# Altium PCB HVBoard_PCB.PcbDoc
Units mm, origin at the board's own origin, x right, y up, seen from the top; angles counter-clockwise.
Board outline 60 x 140 mm, 2 copper layers (Top Layer, Bottom Layer); 64 components, 28 nets, 196 pads, 10 vias.
Unrouted connection lines stored in the file: 15.
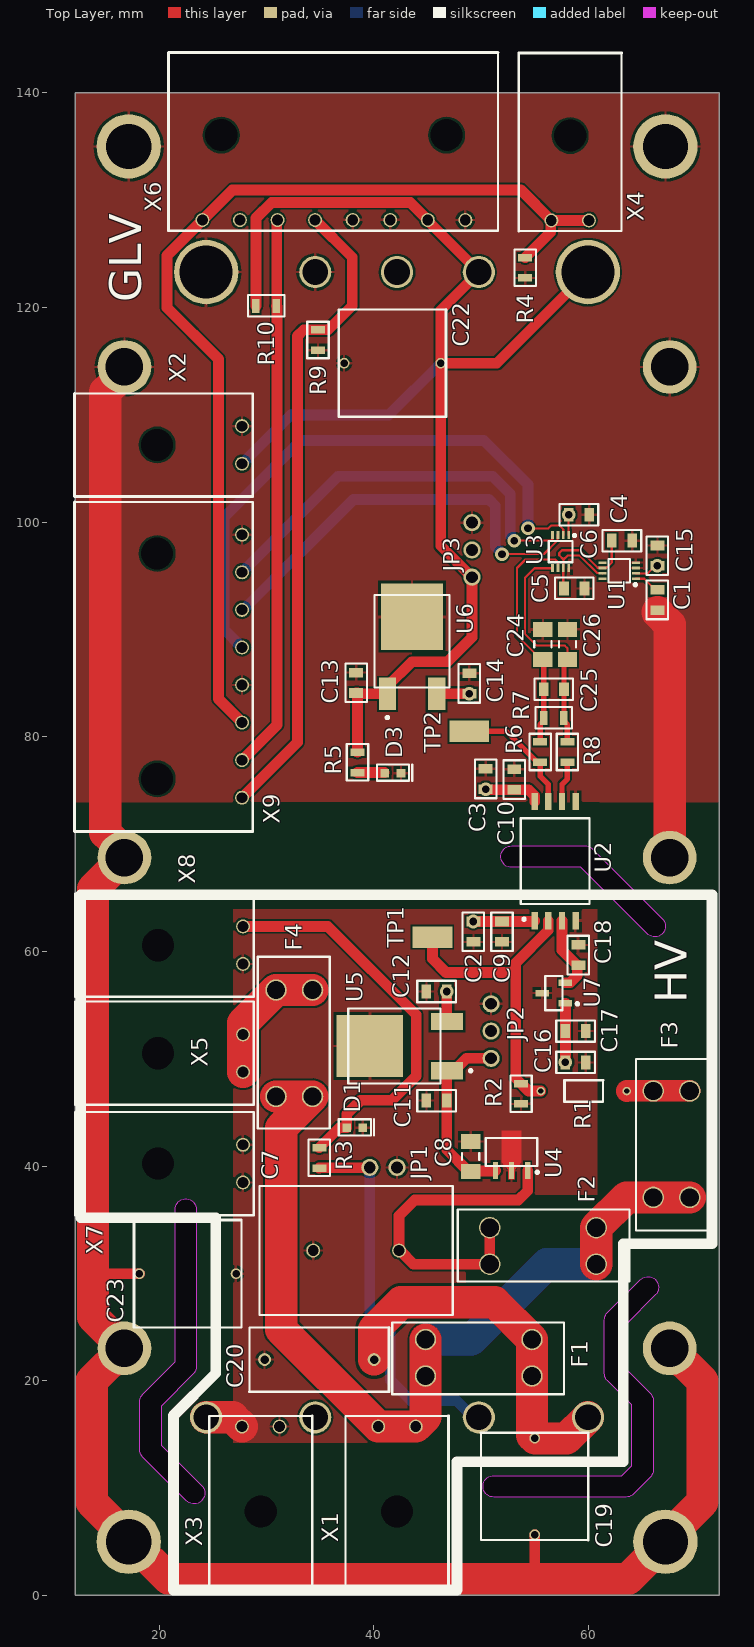
[diagram p0: Top Layer view]
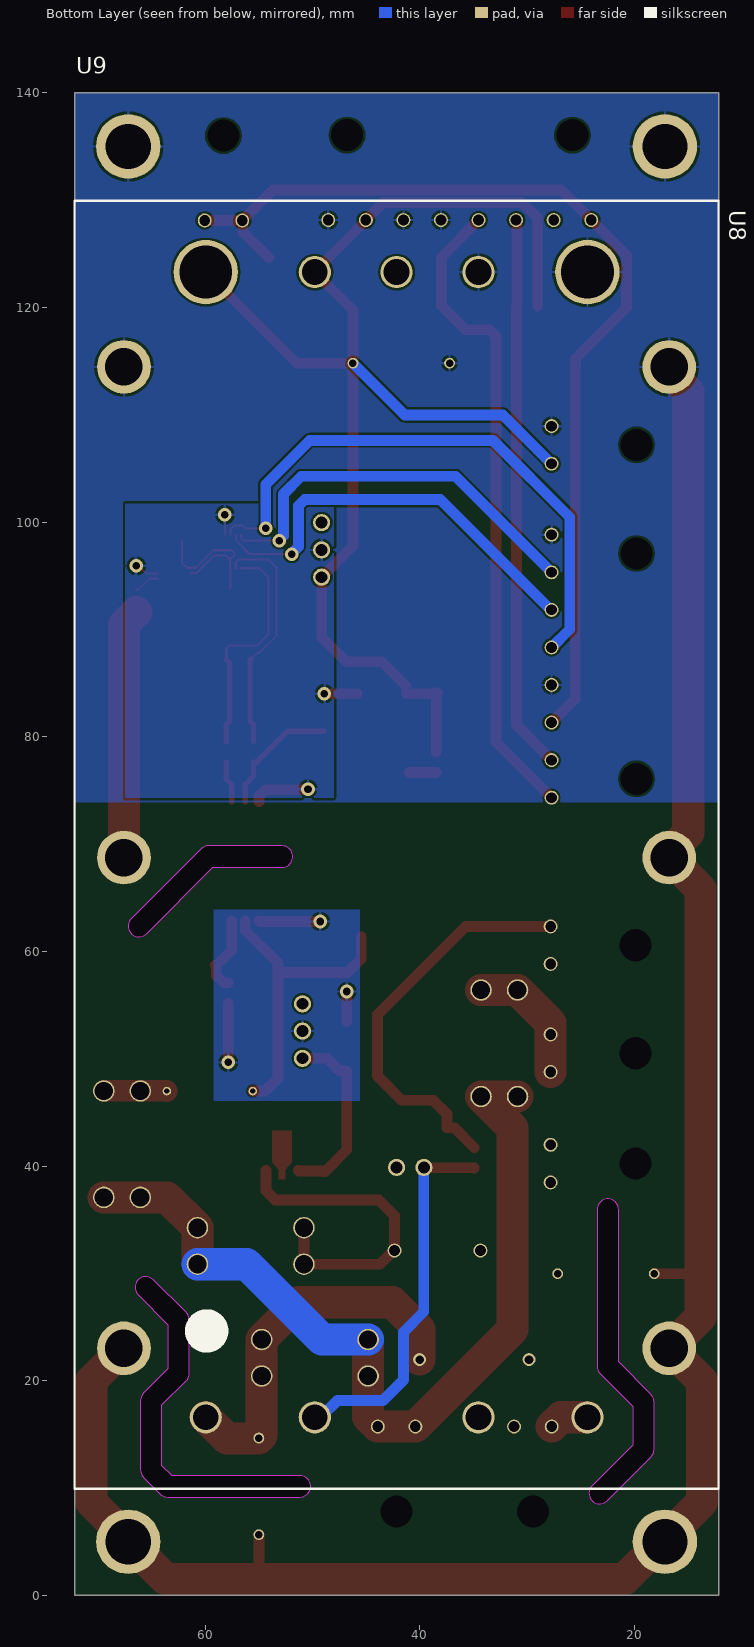
[diagram p1: Bottom Layer view, seen from below]

## Layer stack, top to bottom
Top Solder: solder mask 0.0102, Solder Resist, Dk 3.5
Top Layer: signal copper 0.0356
Dielectric 1: dielectric 0.32, FR-4, Dk 4.8
Bottom Layer: signal copper 0.0356
Bottom Solder: solder mask 0.0102, Solder Resist, Dk 3.5

## Board outline
12.164,0 12.164,140 72.164,140 72.164,0
cut-out: 51.181,11.16 63.086,11.16 64.024,12.098 64.024,17.747 61.777,19.994 cw(c62.484,20.701) 61.484,20.701 61.484,25.654 cw(c62.484,25.654) 61.777,26.361 64.825,29.409 cw(c65.532,28.702) 66.532,28.702 cw(c65.532,28.702) 66.239,27.995 63.484,25.24 63.484,21.115 65.731,18.868 cw(c65.024,18.161) 66.024,18.161 66.024,11.684 cw(c65.024,11.684) 65.731,10.977 64.207,9.453 cw(c63.5,10.16) 63.5,9.16 51.181,9.16 cw(c51.181,10.16)
cut-out: 52.832,67.834 cw(c52.832,68.834) 52.832,69.834 59.69,69.834 cw(c59.69,68.834) 60.397,69.541 66.874,63.064 cw(c66.167,62.357) 67.167,62.357 cw(c66.167,62.357) 65.46,61.65 59.276,67.834
cut-out: 18.47,12.882 cw(c19.177,13.589) 18.177,13.589 18.177,18.034 cw(c19.177,18.034) 18.47,18.741 21.479,21.75 21.479,35.941 cw(c22.479,35.941) 23.479,35.941 23.479,21.336 cw(c22.479,21.336) 23.186,20.629 20.177,17.62 20.177,14.003 23.948,10.232 cw(c23.241,9.525) 24.241,9.525 cw(c23.241,9.525) 22.534,8.818

## Design rules (kind name [scope] priority, off if disabled: settings)
Clearance Isolation [InNet('GND-HV') vs InNet('GND-LV')] p1: gap=0.15 ignorepadtopadclearanceinfootprint=FALSE except(10: Fill-Fill Fill-Poly Fill-Region Poly-Poly Poly-Region Region-Region)
Clearance Clearance_HV [InNetClass('HV')] p2: gap=0.3 ignorepadtopadclearanceinfootprint=FALSE
Clearance [All] p3: gap=0.15 ignorepadtopadclearanceinfootprint=FALSE except(0.2: Arc-Fill Arc-Poly Arc-Region Track-Fill Track-Poly Track-Region SMDPad-Fill SMDPad-Poly SMDPad-Region THPad-Fill THPad-Poly THPad-Region Via-Fill Via-Poly Via-Region Fill-Fill Fill-Poly Fill-Region Poly-Poly Poly-Region Region-Region)
ComponentClearance [All] p1: gap=0.254 collisioncheckmode=3 verticalgap=0 showdistances=FALSE
HoleSize [All] p1: absolutevalues=TRUE maxlimit=100 minlimit=0.025 maxpercent=80.000 minpercent=20.000
MinimumSolderMaskSliver [All] p1: minsoldermaskwidth=0.2
PolygonConnect [All] p1: connectstyle=Relief reliefconductorwidth=0.254 reliefentries=4 polygonreliefangle="90 Angle" airgapwidth=0.254
RoomDefinition IMD [InComponentClass('IMD')] p1: confinementstyle=ConfineIn formatcopy=TRUE lockcomponents=FALSE outline 88.265,1.524 161.163,1.524 161.163,144.653 88.265,144.653
RoomDefinition VoltageMeasurement [InComponentClass('VoltageMeasurement')] p2 off: confinementstyle=ConfineIn formatcopy=TRUE lockcomponents=FALSE outline 0,0 50.8,0 50.8,25.4 0,25.4
RoomDefinition IsoPowerSupply [InComponentClass('IsoPowerSupply')] p3 off: confinementstyle=ConfineIn formatcopy=TRUE lockcomponents=FALSE outline 88.392,1.524 93.345,1.524 93.345,17.145 88.392,17.145
RoutingVias [All] p1: holewidth=0.711 width=1.27 viastyle="Through Hole" minholewidth=0.711 minwidth=1.27 maxholewidth=0.711 maxwidth=1.27
SilkToSolderMaskClearance [IsPad] p1: minsilkscreentomaskgap=0.15 clearancetoexposedcopper=TRUE
SolderMaskExpansion [All] p1: expansion=0.102 istentingtop=FALSE
Width [All] p1: maxlimit=5 minlimit=0.2 preferedwidth=0.2 minimp=50.000000 maximp=50.000000 favimp=50.000000
26 further rules are at their usual default settings.

## Classes and differential pairs
net class HV: NetC19_2
component class IMD: F4 R4 R9 R10 U9 X4 X5 X6 X7 X9
component class VoltageMeasurement: C1 C2 C3 C4 C5 C6 C9 C10 C15 C16 C17 C18 C24 C25 C26 F3 R1 R2 R6 R7 R8 TP1 TP2 U1 U2 U3 U7 X1 X3
component class IsoPowerSupply: C7 C8 C11 C12 C13 C14 C19 C20 C22 C23 D1 D3 F1 F2 JP1 JP2 JP3 R3 R5 U4 U5 U6 U8 X2 X8

## Components (designator, comment, footprint, x,y, rotation, side; value= is the part's Value field where it differs from the comment)
C1 "100nF" C0805 66.421,92.748 r90 top
C2 "10uF" C0805 49.276,61.837 r270 top
C3 "10uF" C0805 50.419,76.073 r90 top
C4 "10uF" C0805 63.119,98.27 r180 top
C5 "1uF" C0805 58.674,93.825 r0 top
C6 "1uF" C0805 59.116,100.683 r180 top
C7 "2.2uF" "Cap-2.2u- ECW-FD2W225J4" 38.354,32.131 r0 top
C8 "22uF" C1206 49.022,40.894 r270 top
C9 "100nF" C0805 51.943,61.837 r270 top
C10 "100nF" C0805 53.086,76.012 r90 top
C11 "10uF" C0805 45.847,46.101 r0 top
C12 "4u7" C0805 45.847,56.261 r0 top
C13 "10uF" C0805 38.354,85.029 r270 top
C14 "4u7" C0805 48.895,84.963 r270 top
C15 "100nF" C0805 66.421,96.873 r270 top
C16 "10uF" C0805 58.801,49.657 r180 top
C17 "100nF" C0805 58.801,52.578 r180 top
C18 "100nF" C0805 59.055,59.659 r270 top
C19 "4.7nF" Cap-4.7n-SV03HC472MAR 54.991,10.16 r90 top
C20 "0.22uF" Cap-0.22-SK057C224KAR 34.925,21.971 r0 top
C22 "4.7nF" Cap-4.7n-SV03HC472MAR 41.728,114.808 r0 top
C23 "4.7nF" Cap-4.7n-SV03HC472MAR 22.661,29.972 r180 top
C24 "1nF" C1206 55.753,88.615 r90 top
C25 "2.2nF" C0805 56.769,84.424 r180 top
C26 "1nF" C1206 58.039,88.615 r270 top
D1 "LTST-C191KGKT" LED_0603 38.227,43.561 r0 top
D3 "LTST-C191KGKT" LED_0603 41.783,76.6 r0 top
F1 "3568" FUSE_MINI_HOLDER 44.817,23.838 r0 top
F2 "3568" FUSE_MINI_HOLDER 60.72,30.861 r180 top
F3 "3568" FUSE_MINI_HOLDER 66.04,37.084 r90 top
F4 "3568" FUSE_MINI_HOLDER 34.29,56.402 r270 top
JP1 "952-2262-ND" 2PIN_HEADER 39.624,39.878 r0 top
JP2 "732-5316-ND" 3PIN_HEADER 50.927,52.578 r90 top
JP3 "732-5316-ND" 3PIN_HEADER 49.149,97.409 r90 top
R1 "475k" Res-475k-RNF18FTD475K 59.563,46.99 r180 top
R2 "4.99k" R0805 53.721,46.736 r90 top
R3 "2.2k" R0805 34.925,40.767 r270 top
R4 "2.2k" R0805 54.102,123.698 r270 top
R5 "6.34k" R0805 38.481,77.616 r90 top
R6 "30" R0805 55.499,78.582 r90 top
R7 "DNP" R0805 56.769,81.757 r180 top
R8 "30" R0805 58.039,78.582 r90 top
R9 "2.2k" R0805 34.798,116.967 r270 top
R10 "2.2k" R0805 29.972,120.142 r0 top
TP1 "5015" TP_HOOK 45.466,61.341 r180 top
TP2 "5015" TP_HOOK 48.895,80.518 r0 top
U1 "MAX6126A28+" REF5030IDGKT 62.865,95.476 r180 top
U2 "AMC1301DWVR" AMC1301DWVR 56.896,68.403 r90 top
U3 "ADS7044IDCUR" ADS7044IDCUR 57.404,97.254 r270 top
U4 "NCP785AH120T1G" NCP785AH120T1G 52.832,41.021 r180 top
U5 "NCV5501DT50RKG" NCV5501DT50RKG 42.418,51.181 r0 top
U6 "NCV5501DT33RKG" NCV5501DT50RKG 43.561,88.392 r270 top
U7 "ISL21010CFH315Z-TK" ISL21010CFH315Z-TK 56.769,56.122 r180 top
U8 "V150A12C500BL" Vicor-V150A12C500BL 42.164,69.94 r90 bottom locked
U9 "IR155-3204" IR155-3204 42.164,5 r90 bottom locked
X1 "1723102202" Molex2Pin 42.164,15.727 r0 top
X2 "1723102202" Molex2Pin 27.722,107.188 r270 top
X3 "1723102202" Molex2Pin 29.464,15.727 r0 top
X4 "1723102202" Molex2Pin 58.293,128.107 r180 top
X5 "1723102202" Molex2Pin 27.813,50.518 r270 top
X6 "1723102208" Molex8Pin 36.279,128.143 r180 top
X7 "1723102202" Molex2Pin 27.813,40.231 r270 top
X8 "1723102202" Molex2Pin 27.813,60.579 r270 top
X9 "1723102208" Molex8Pin 27.722,86.573 r270 top

## Footprints (in the part's own frame and the unit in brackets; to place one, negate y for a bottom-side part, rotate by r counter-clockwise, add the part's x,y. Pads: shape width x height; smd on the part's side, far side on the other; paste and mask are expansions set on the pad)
2PIN_HEADER [mm]
  round 1.6 hole 1.1: 1(0,0) 2(2.54,0)
  body extent -1.27,-1.27 3.81,1.27, height 9.5
3PIN_HEADER [mm]
  round 1.6 hole 1.1: 1(-2.54,0) 2(0,0) 3(2.54,0)
  body extent -3.81,-1.27 3.81,1.27, height 9.5
ADS7044IDCUR [mm] "ADC-ADS7044IDCUR"
  rect 0.75x0.25 smd: 1(-1.55,0.75) 2(-1.55,0.25) 3(-1.55,-0.25) 4(-1.55,-0.75) 5(1.55,-0.75) 6(1.55,-0.25) 7(1.55,0.25) 8(1.55,0.75)
  silkscreen extent -1.62,-1.1 1,1.43, body extent -1.6,-1.05 1.6,1.05, height 0.9
AMC1301DWVR [mm] "AMC1301DWVR"
  rect 1.6x0.6 smd: 1(-5.55,1.905) 2(-5.55,0.635) 3(-5.55,-0.635) 4(-5.55,-1.905) 5(5.55,-1.905) 6(5.55,-0.635) 7(5.55,0.635) 8(5.55,1.905)
  silkscreen extent -5.52,-3.2 4,3.2, body extent -5.83,-2.97 5.83,2.98, height 2.75
C0805 [mm]
  rect 0.9x1.3 smd: 1(-0.95,0) 2(0.95,0)
  silkscreen extent -1.8,-1 1.8,1
C1206 [mm] "Chip Resistor, 2-Leads, Body 3.20x1.60mm, IPC Medium Density"
  rect 1.4x1.8 smd: 1(-1.4,0) 2(1.4,0)
  silkscreen extent -0.3,-0.8 0.3,0.8, body extent -1.75,-0.9 1.75,0.9, height 1.45
Cap-0.22-SK057C224KAR [mm] "Cap-0.22-SK057C224KAR"
  round 1.2 hole 0.8: 1(-5.1,0) 2(5.1,0)
  silkscreen extent -6.5,-3 6.5,3, body extent -6.35,-2.58 6.35,2.5, height 12.75
"Cap-2.2u- ECW-FD2W225J4" [mm] "Cap-2.2u- ECW-FD2W225J4"
  round 1.3 hole 1: 1(-4,0) 2(4,0)
  silkscreen extent -9,-6 9,6, body extent -8.75,-5.5 8.75,5.6, height 15.65
Cap-4.7n-SV03HC472MAR [mm] "Cap-4.7n-FSV03HC472MAR"
  round 1 hole 0.7: 1(-4.5,0) 2(4.5,0)
  silkscreen extent -5,-5 5,5, body extent -4.7,-4.7 4.7,4.7, height 8.81
FUSE_MINI_HOLDER [mm]
  round 2 hole 1.7: 1(0,-3.4) 1(0,0) 2(9.92,-3.4) 2(9.92,0)
  silkscreen extent -3.1,-5.1 12.9,1.6, body extent -3.1,-5.09 12.9,1.65, height 7.36
IR155-3204 [mm] "IR155-3204"
  round 6 hole 4.2: 1(0,-25) 1(0,25) 1(130,-25) 1(130,25)
  body extent -5,-29.9 136,30.1, height 35
ISL21010CFH315Z-TK [mm] "ISL21010CFH315Z-TK"
  rect 1.25x0.6 smd: 1(-1.08,0.95) 2(-1.08,-0.95) 3(1.07,0)
  silkscreen extent -2.33,-1.6 0.8,1.6
LED_0603 [mm]
  rect 0.8x0.8 smd: 1(-0.75,0) 2(0.75,0)
  silkscreen extent -1.5,-0.7 1.8,0.8
Molex2Pin [mm] "Molex2Pin-1723102202"
  round 1.3 hole 1: 1(-1.75,0) 2(1.75,0)
  round 0 hole 3 unplated: ""(0,-7.91)
  silkscreen extent -4.8,-15.6 4.8,1, body extent -4.5,-15.25 4.5,0.38, height 9.06
Molex8Pin [mm] "Molex8Pin-1723102208"
  round 1.3 hole 1: 1(12.25,0) 2(8.75,0) 3(5.25,0) 4(1.75,0) 5(-1.75,0) 6(-5.25,0) 7(-8.75,0) 8(-12.25,0)
  round 0 hole 3 unplated: ""(-10.5,-7.91) ""(10.5,-7.91)
  silkscreen extent -15.3,-15.6 15.4,1, body extent -15,-15.33 15,0.3, height 9.06
NCP785AH120T1G [mm] "Reg-NCP785AH120T1G"
  rect 0.5x1.57 smd: 1(-1.5,1.44) 3(1.5,1.44)
  rect 0.5x1.57 smd paste+0 mask+0: 2(0,1.44)
  Top Layer region: -0.3,2.225 -0.3,1.365 -0.9,0.653 -0.9,-2.25 0.9,-2.25 0.9,0.653 0.3,1.365 0.3,2.225
  silkscreen extent -2.53,-1.6 2.4,1.72
NCV5501DT50RKG [mm] "reg- NCV5501DT50RKG"
  rect 3x1.6 smd: 1(4.39,-2.3) 3(4.39,2.3)
  rect 6.2x5.8 smd: 2(-2.79,0)
  silkscreen extent -4.8,-3.5 6.73,3.5
R0805 [mm]
  rect 0.7x1.3 smd: 1(-0.95,0) 2(0.95,0)
  silkscreen extent -1.7,-1 1.7,1
REF5030IDGKT [mm] "VREF-REF5030IDGKT"
  rect 0.75x0.25 smd: 1(-1.55,0.75) 2(-1.55,0.25) 3(-1.55,-0.25) 4(-1.55,-0.75) 5(1.55,-0.75) 6(1.55,-0.25) 7(1.55,0.25) 8(1.55,0.75)
  silkscreen extent -1.63,-1.1 1,1.42, body extent -1.6,-1.05 1.6,1.05, height 0.9
Res-475k-RNF18FTD475K [mm] "Res-475k-RNF18FTD475K"
  round 0.8 hole 0.5: 1(-4,0) 2(4,0)
  silkscreen extent -1.8,-1 1.8,1
TP_HOOK [mm]
  rect 3.7x2 smd: 1(0,0)
  body extent -1.56,-0.51 1.56,0.51, height 1.52
Vicor-V150A12C500BL [mm] "Vicor-V150A12C500BL"
  round 3 hole 2.4: 1(-53.35,17.78) 2(-53.35,7.62) 3(-53.35,-7.62) 4(-53.35,-17.78) 6(53.35,-7.62) 7(53.35,0) 8(53.35,7.62)
  round 6 hole 4.93: 5(53.35,-17.78) 9(53.35,17.78)
  round 5 hole 3.5: 10(-46.92,-25.4) 10(-46.92,25.4) 10(-1.2,-25.4) 10(-1.2,25.4) 10(44.52,-25.4) 10(44.52,25.4)
  silkscreen extent -60,-30 60,30, body extent -59.54,-27.9 57.3,27.98, height 13.5

## Part data
C1 C9 C10 C15 C17 C18: library part GRM21B7U1A104JA01L, "CAP MLCC 100nF 10Volts U2J 5%", Case Code (Imperial)=0805, Case Code (Metric)=2012, Dielectric=U2J, Manufacturer=Murata, Max Operating Temperature=125°C, Min Operating Temperature=-55°C, Package Quantity=3000, Supplier Part Number 1=490-11592-6-ND, Tolerance=5%, Voltage Rating=10V, Capacitance=100nF, Case/Package=0805, ComponentLink1Description=https://datasheet.ciiva.com/5424/product-5424660.pdf, ComponentLink1URL=https://datasheet.ciiva.com/5424/product-5424660.pdf, ComponentLink2Description=https://datasheet.ciiva.com/17451/product-17451845.pdf, ComponentLink2URL=https://datasheet.ciiva.com/17451/product-17451845.pdf, ComponentLink3Description=https://datasheet.ciiva.com/11618/product-11618924.pdf, ComponentLink3URL=https://datasheet.ciiva.com/11618/product-11618924.pdf, Depth=1.25mm, Height=1.25mm, Length=2mm, Manufacturer Part Number=GRM21B7U1A104JA01L, Mount="Surface Mount", Packaging="Tape and Reel", Pricing 1="1=0.46, 10=0.32, 100=0.192, 500=0.144, 1000=0.1216 (USD)", Radiation Hardening=No, Stock 1=6000, Supplier 1=Digi-Key, Termination=SMD/SMT, Thickness=0.053inch, Voltage Rating (DC)=10V, Width=0.049inch
C2 C3 C4 C16: library part GCM21BR71A106KE22L, "CAP CER 10UF 10V X7R 0805", Manufacturer=Murata, Op Temp Range=-55-125, Package=0805, Supplier Part Number 1=490-10674-1-ND, Temp Coef=X7R, Tolerance=10%, Voltage Rating=10V, Capacitance=10uF, Supplier 1=Digi-Key
C5 C6: library part GCM21BR71C105KA58K, "CAP CER 1UF 16V X7R 0805", Manufacturer=Murata, Manufacturer Part Number=GCM21BR71C105KA58K, Supplier 1=Digi-Key
C7: library part ECW-FD2W225J4, "CAP FILM 2.2UF 5% 450VDC RADIAL", Manufacturer=Panasonic, Manufacurer Part number=ECW-FD2W225J4, Supplier 1=Digi-Key
C8: library part GCM32ER71C226KE19L, "CAP CER 22UF 16V X7R 1210", Manufacturer=Murata, Manufacturer Part Number=GCM31CR71A226KE02L, Supplier 1=Digi-Key
C11 C13: library part CL21B106KOQNNNG, "CAP CER 10UF 16V X7R 0805", Manufacturer=Samsung, Op Temp Range=-55-125, Package=0805, Supplier Part Number 1=1276-6472-2-ND, Temp Coef=X7R, Tolerance=10%, Voltage Rating=16V, Capacitance=10uF, Supplier 1=Digi-Key
C12 C14: library part GRM219R61A475KE34D, "CAP MLCC 4.7µF ±10% 10V X5R Ceramic Capacitor -55°C ~ 85°C Surface Mount, MLCC 0805 (2012 Metric) 0.079\" L x 0.049\" W (2.00mm x 1.25mm)", Capacitance=4.7uF, Case Code (Imperial)=0805, Case Code (Metric)=2012, Dielectric=X5R, Manufacturer=Murata, Max Operating Temperature=85°C, Min Operating Temperature=-55°C, Package Quantity=4000, Supplier Part Number 1=490-3339-6-ND, Tolerance=10%, Voltage=10V, Case/Package=0805, ComponentLink1Description=https://datasheet.ciiva.com/169/product-169527.pdf, ComponentLink1URL=https://datasheet.ciiva.com/169/product-169527.pdf, ComponentLink2Description=https://datasheet.ciiva.com/5414/product-5414984.pdf, ComponentLink2URL=https://datasheet.ciiva.com/5414/product-5414984.pdf, ComponentLink3Description=https://datasheet.ciiva.com/16467/product-16467258.pdf, ComponentLink3URL=https://datasheet.ciiva.com/16467/product-16467258.pdf, ComponentLink4Description=https://datasheet.ciiva.com/29542/product-29542667.pdf, ComponentLink4URL=https://datasheet.ciiva.com/29542/product-29542667.pdf, ComponentLink5Description=https://datasheet.ciiva.com/29542/product-29542668.pdf, ComponentLink5URL=https://datasheet.ciiva.com/29542/product-29542668.pdf, Depth=1.25mm, Height=0.85mm, Lead Free="Lead Free", Length=2mm, Manufacturer Part Number=GRM219R61A475KE34D, Mount="Surface Mount", Packaging="Tape and Reel", Pricing 1="1=0.21, 10=0.152, 100=0.0716, 500=0.0502, 1000=0.0416 (USD)", Stock 1=251830, Supplier 1=Digi-Key, Termination=SMD/SMT, Thickness=0.037inch, Voltage Rating=10V, Voltage Rating (DC)=10V, Width=0.049inch
C19 C22 C23: library part SV03HC472MAR, "CAP CER 4700PF 3KV X7R RADIAL", Manufacturer="AVX Corporation", Manufacturer Part Number=SV03HC472MAR, Supplier 1=Digi-Key
C20: library part SK057C224KAR, "CAP CER 0.22UF 500V X7R RADIAL", Capacitance=100nF, Case Code (Imperial)=0805, Case Code (Metric)=2012, Dielectric=U2J, Manufacturer="AVX Corporation", Max Operating Temperature=125°C, Min Operating Temperature=-55°C, Package Quantity=3000, Supplier Part Number 1=490-11592-6-ND, Tolerance=5%, Voltage Rating=10V, Case/Package=0805, ComponentLink1Description=https://datasheet.ciiva.com/5424/product-5424660.pdf, ComponentLink1URL=https://datasheet.ciiva.com/5424/product-5424660.pdf, ComponentLink2Description=https://datasheet.ciiva.com/17451/product-17451845.pdf, ComponentLink2URL=https://datasheet.ciiva.com/17451/product-17451845.pdf, ComponentLink3Description=https://datasheet.ciiva.com/11618/product-11618924.pdf, ComponentLink3URL=https://datasheet.ciiva.com/11618/product-11618924.pdf, Depth=1.25mm, Height=1.25mm, Length=2mm, Manufacturer Part Number=SK057C224KAR, Mount="Surface Mount", Packaging="Tape and Reel", Pricing 1="1=0.46, 10=0.32, 100=0.192, 500=0.144, 1000=0.1216 (USD)", Radiation Hardening=No, Stock 1=6000, Supplier 1=Digi-Key, Termination=SMD/SMT, Thickness=0.053inch, Voltage Rating (DC)=10V, Width=0.049inch
C24 C26: library part CC1206KKX7RCBB102, "CAP MLCC 1000PF 1KV X7R 1206 Series Comm. Isolation Caps", Manufacturer=Yageo, Manufacturer Part Number=CC1206KKX7RCBB102, Supplier 1=Digi-Key
C25: library part GCJ21AR72E222KXJ1D, "CAP CER 2200PF 250V X7R 0805", Manufacturer=Murata, Manufacturer Part Number=GCJ21AR72E222KXJ1D, Supplier 1=Digi-Key
D1 D3: "LED GREEN CLEAR 0603 SMD", Case Code (Imperial)=0603, Case Code (Metric)=1608, Colour=Green, Forward Current=30mA, Forward Voltage=2V, Lens Colour=Clear,Colorless, Manufacturer="Vishay Lite-On", Max Operating Temperature=85°C, Min Operating Temperature=-55°C, Package Quantity=1, Power Dissipation=75mW, Supplier Part Number 1=160-1446-6-ND, Test Current=20mA, Case/Package=0603, ComponentLink1Description=https://datasheet.ciiva.com/12400/100-ltst-c191kgkt-53586-12400818.pdf, ComponentLink1URL=https://datasheet.ciiva.com/12400/100-ltst-c191kgkt-53586-12400818.pdf, ComponentLink2Description=https://datasheet.ciiva.com/2109/s-110-ltst-c191kgkt-2109973.pdf, ComponentLink2URL=https://datasheet.ciiva.com/2109/s-110-ltst-c191kgkt-2109973.pdf, ComponentLink3Description=https://datasheet.ciiva.com/2109/s-110-ltst-c191kgkt-2109974.pdf, ComponentLink3URL=https://datasheet.ciiva.com/2109/s-110-ltst-c191kgkt-2109974.pdf, ComponentLink4Description=https://datasheet.ciiva.com/2109/s-110-ltst-c191kgkt-2109975.pdf, ComponentLink4URL=https://datasheet.ciiva.com/2109/s-110-ltst-c191kgkt-2109975.pdf, ComponentLink5Description=https://datasheet.ciiva.com/15223/getdatasheetpartid-103913-15223276.pdf, ComponentLink5URL=https://datasheet.ciiva.com/15223/getdatasheetpartid-103913-15223276.pdf, ComponentLink6Description=https://datasheet.ciiva.com/11773/0900766b80dc02b1-11773629.pdf, ComponentLink6URL=https://datasheet.ciiva.com/11773/0900766b80dc02b1-11773629.pdf, ComponentLink7Description=https://datasheet.ciiva.com/16215/ltst-c191kgkt-16215151.pdf, ComponentLink7URL=https://datasheet.ciiva.com/16215/ltst-c191kgkt-16215151.pdf, Depth=0.8mm, Dominant Wavelength=571nm, Height=0.55mm, Illumination Colour=Green, Lead Free="Lead Free", Length=1.6mm, Lens Style=Clear,Diffused,Colorless,Rectangular, Lens Transparency=Clear, Luminous Intensity=35mcd, Manufacturer Part Number=LTST-C191KGKT, Mount="Surface Mount", Number of Elements=1, Number of LEDs=1, Number of Pins=2, Packaging="Tape and Reel", Power Rating=75mW, Pricing 1="1=0.29, 10=0.211, 25=0.1556, 100=0.1111, 250=0.0756, 500=0.0667, 1000=0.0522, 2500=0.0511 (USD)", Radiation Hardening=No, Stock 1=1301664, Supplier 1=Digi-Key, Viewing Angle=130°, Wavelength=574nm, Width=0.8mm
F1 F2 F3 F4: "FUSE HOLDER MINI AUTO PC", Colour=Black, Current Rating=20A, Flammability Rating="UL94 V-0", Manufacturer="Keystone Electronics", Max Operating Temperature=145°C, Min Operating Temperature=-50°C, Package Quantity=1, Supplier Part Number 1=36-3568-ND, Voltage=500V, Approvals=UL, Body Material=Nylon, ComponentLink1Description=https://datasheet.ciiva.com/16294/m60-2p40-16294706.pdf, ComponentLink1URL=https://datasheet.ciiva.com/16294/m60-2p40-16294706.pdf, ComponentLink2Description=https://datasheet.ciiva.com/16874/70182101-16874378.pdf, ComponentLink2URL=https://datasheet.ciiva.com/16874/70182101-16874378.pdf, Contact Material=Brass,Nickel,Tin, Contact Plating=Tin, Depth=6.73mm, Fuse Current=20A, Fuse Type=Automotive, Illumination Type=Illuminated, Lead Free="Lead Free", Length=16mm, Manufacturer Part Number=3568, Material=Brass,Nickel,Tin,Nylon, Mount=Vertical,PCB, Number of Circuits=1, Number of Poles=1, Orientation=Vertical, Pricing 1="1=0.98, 10=0.853, 50=0.7694, 100=0.7359, 250=0.669, 1000=0.599, 2500=0.502, 5000=0.4683 (USD)", REACH SVHC="No SVHC", Stock 1=69840, Supplier 1=Digi-Key, Termination="PC Pin", Voltage Rating (AC)=500V
JP1: library part M20-9990246, "CONN_HeaderPins2pos Headers & Wire Housings 02 SIL VERTICAL PIN HEADER TIN", Case/Package=SIL, Colour=Black, Contact Resistance=30mR, Current Rating=3A, Insulation Resistance=10GR, Manufacturer=Harwin, Max Operating Temperature=105°C, Min Operating Temperature=-40°C, Package Quantity=1000, Voltage Rating (AC)=750V, ComponentLink1Description=https://datasheet.ciiva.com/8046/315376-8046930.pdf, ComponentLink1URL=https://datasheet.ciiva.com/8046/315376-8046930.pdf, ComponentLink2Description=https://datasheet.ciiva.com/6833/m20-999-6833368.pdf, ComponentLink2URL=https://datasheet.ciiva.com/6833/m20-999-6833368.pdf, ComponentLink3Description=https://datasheet.ciiva.com/11745/0900766b81034e61-11745755.pdf, ComponentLink3URL=https://datasheet.ciiva.com/11745/0900766b81034e61-11745755.pdf, ComponentLink4Description=https://datasheet.ciiva.com/22660/1830818-22660571.pdf, ComponentLink4URL=https://datasheet.ciiva.com/22660/1830818-22660571.pdf, ComponentLink5Description=https://datasheet.ciiva.com/26852/getdatasheetpartid-384170-26852203.pdf, ComponentLink5URL=https://datasheet.ciiva.com/26852/getdatasheetpartid-384170-26852203.pdf, Connector Type="Male Pin", Contact Material=Bronze,Brass, Contact Mating Length=0.24inch, Contact Plating=Tin, Depth=2.54mm, Gender=Male, Housing Colour=Black, Housing Material=Nylon, Length=5.08mm, Manufacturer Part Number=M20-9990246, Max Current Rating=3A, Number of Contacts=2, Number of Positions=2, Number of Rows=1, Orientation=Straight, Packaging=Bulk, Pitch=2.54mm, Pricing 1="1=0.11, 10=0.099, 100=0.0609, 500=0.0504, 1000=0.0441, 5000=0.0378, 10000=0.0368 (USD)", Radiation Hardening=No, REACH SVHC="No SVHC", Stock 1=53577, Supplier 1=Digi-Key, Supplier Part Number 1=952-2262-ND, Termination=Solder
JP2 JP3: library part 61300311121, "CONN_HeaderPins3pos WURTH ELEKTRONIK Board-To-Board Connector, Vertical, WR-PHD Series, Through Hole, Header, 3 Contacts, 2.54 mm", Case/Package=100, Colour=Black, Manufacturer="Wurth Electronics", ComponentLink1Description=http://www.farnell.com/cad/1737268.pdf, ComponentLink1URL=http://www.farnell.com/cad/1737268.pdf, Connector Type="Male Pin", Contact Material=Copper, Contact Mating Length=0.236inch, Contact Plating=Gold, Gender=Male, Lead Free="Lead Free", Manufacturer Part Number=61300311121, Mount="Through Hole", Number of Contacts=3, Number of Positions=3, Number of Rows=1, Packaging=Bulk, Pitch=0.1inch, Pricing 1="1=0.13, 10=0.106, 25=0.088, 50=0.074, 100=0.067, 1000=0.061 (USD)", REACH SVHC=Unknown, Stock 1=57026, Supplier 1=Digi-Key, Supplier Part Number 1=732-5316-ND, Termination=Solder
R1: library part RNF18FTD475K, "RES 475K OHM 1/8W 1% AXIAL", Op Temp Range=-55-155, Package=axial, Power=0.125W, Supplier Part Number 1=RNF18FTD475KCT-ND, Temp Coef=100ppm/C, Tolerance=1%, Supplier 1=Digi-Key
R2: library part ERA-6AEB4991V, "RES 4.99K OHM 0.1% 1/8W 0805", Op Temp Range=-55-155, Package=0805, Power=0.125W, Supplier Part Number 1=P4.99KDACT-ND, Temp Coef=25ppm/C, Tolerance=0.1%, Supplier 1=Digi-Key
R3 R4 R9 R10: library part RC0805JR-072K2L, "RES SMD 2.2K OHM 5% 1/8W", Case Code (Imperial)=0805, Case Code (Metric)=2012, Manufacturer=Yageo, Max Operating Temperature=155°C, Min Operating Temperature=-55°C, Power Rating=125mW, Resistance=2.2kR, Supplier Part Number 1=311-2.2KARCT-ND, Temperature Coefficient=100ppm/°C, Tolerance=5%, Voltage Rating=150V, Case/Package=0805, ComponentLink1Description=https://datasheet.ciiva.com/12667/rc0805-12667397.pdf, ComponentLink1URL=https://datasheet.ciiva.com/12667/rc0805-12667397.pdf, ComponentLink2Description=https://datasheet.ciiva.com/15190/getdatasheetpartid-251869-15190044.pdf, ComponentLink2URL=https://datasheet.ciiva.com/15190/getdatasheetpartid-251869-15190044.pdf, ComponentLink3Description=https://datasheet.ciiva.com/7941/442941-7941935.pdf, ComponentLink3URL=https://datasheet.ciiva.com/7941/442941-7941935.pdf, Composition="Thick Film", Contact Plating=Tin,Lead,Matte, Depth=1.25mm, Lead Free="Lead Free", Length=2mm, Manufacturer Part Number=RC0805JR-072K2L, Military Standard=Not, Packaging="Tape and Reel", Pricing 1="1=0.1, 10=0.019, 100=0.0076, 1000=0.0034, 2500=0.003 (USD)", Radiation Hardening=No, REACH SVHC=Unknown, Stock 1=810523, Supplier 1=Digi-Key, Termination=SMD/SMT
R5: library part ERJ-6ENF6341V, "RES SMD 6.34K OHM 1% 1/8W 0805", Manufacturer=Panasonic, Manufacturer Part Number=ERJ-6ENF6341V, Supplier 1=Digi-Key
R6 R8: library part ERJ-6ENF30R0V, "RES SMD 30 OHM 1% 1/8W 0805", Manufacturer=Panasonic, Manufacturer Part Number=ERJ-6ENF30R0V, Supplier 1=Digi-Key
R7: "RES 0805 DNP"
TP1 TP2: "TEST POINT, PCB, SMT", Colour=White, Manufacturer="Keystone Electronics", Package Quantity=1, Supplier Part Number 1=36-5015CT-ND, ComponentLink1Description=https://datasheet.ciiva.com/2917/5015-2917616.pdf, ComponentLink1URL=https://datasheet.ciiva.com/2917/5015-2917616.pdf, ComponentLink2Description=https://datasheet.ciiva.com/2917/5015-2917617.pdf, ComponentLink2URL=https://datasheet.ciiva.com/2917/5015-2917617.pdf, ComponentLink3Description=https://datasheet.ciiva.com/1123/5015-1123862.pdf, ComponentLink3URL=https://datasheet.ciiva.com/1123/5015-1123862.pdf, ComponentLink4Description=https://datasheet.ciiva.com/16883/70182998-16883734.pdf, ComponentLink4URL=https://datasheet.ciiva.com/16883/70182998-16883734.pdf, Contact Material=Bronze, Contact Plating=Tin,Silver,Lead, Depth=1.01mm, Height=0.06inch, Lead Free="Lead Free", Length=2.66mm, Manufacturer Part Number=5015, Material=Bronze,Silver, Mount="Surface Mount", Number of Ports=1, Orientation=Straight, Packaging="Tape and Reel", Pricing 1="1=0.44, 10=0.421, 25=0.3604, 50=0.3064, 100=0.2944, 250=0.2644, 500=0.2524 (USD)", REACH SVHC="No SVHC", Stock 1=1937775, Supplier 1=Digi-Key, Termination=Solder, Thickness=0.01inch
U1: "IC VREF SERIES 0.06% 8UMAX", Manufacturer="Maxim Integrated", Manufacturer Part Number=MAX6126A28+, Supplier 1=Digi-Key
U2: "IC OPAMP ISOLATION 1 CIRC 8 SOIC", Case/Package=SOIC, Manufacturer="Texas Instruments", ComponentLink1Description=DataSheet, ComponentLink1URL=http://www.ti.com/general/docs/suppproductinfo.tsp?distId=10&gotoUrl=http%3A%2F%2Fwww.ti.com%2Flit%2Fgpn%2Famc1301, Manufacturer Part Number=AMC1301DWVR, Number of Pins=8, Supplier 1=Digi-Key
U3: "IC ADC 12BIT SAR 8VSSOP", Manufacturer="Texas Instruments", Manufacturer Part Number=ADS7044IDCUR, Supplier 1=Digi-Key
U4: "IC REG LINEAR 12V 10MA SOT89-3", Manufacturer="On Semiconductor", Manufacturer Part Number=NCP785AH120T1G, Supplier 1=Digi-Key
U5: "IC REG LINEAR 5V 500MA DPAK", Manufacturer="On Semiconductor", Manufacturer Part Number=NCP785AH120T1G, Supplier 1=Digi-Key
U6: "IC REG LINEAR 3.3V 500MA DPAK", Manufacturer="On Semiconductor", Manufacturer Part Number=NCV5501DT33RKG, Supplier 1=Digi-Key
U7: "IC VREF SERIES 0.2% SOT23-3", Supplier 1=Digi-Key
U8: "Isolated DC/DC Converters C 100/200/150 12v/ 41.7A", Manufacturer="On Semiconductor", Manufacturer Part Number=NCP785AH120T1G, Supplier 1=Digi-Key
U9: "IMD", Manufacturer=Bender, Manufacturer Part Number=IR155-3204, Supplier 1=Digi-Key
X1 X2 X3 X4 X5 X7 X8: "CONN HEADER R/A 2POS 3.5MM", Manufacturer=Molex, Manufacturer Part Number=1723102202, Supplier 1=Digi-Key
X6 X9: "CONN HEADER R/A 8POS 3.5MM", Manufacturer=Molex, Manufacturer Part Number=1723102208, Supplier 1=Digi-Key

## Via types
v1: diameter 1.27, hole 0.711, Top Layer to Bottom Layer, 10 vias

## Nets (pads, with @x,y where several pads share a name; then routed paths per layer and width w, separated by ;. In a path a pad name is that pad's centre, name@x,y a point inside that pad or via, vN(x,y) a via of type N, cw(c..) or ccw(c..) an arc to the next point about the centre after c; other vN are vias at no path point)
+3.3-LV: C3.1 C6.2 C10.1 C14.2 C15.2 JP3.2 U1.2 U2.8 U3.1 U6.3 | length 12.1
  Top Layer w0.2: U3.1 58.154,100.671 v1(58.166,100.683) ; U1.2 65.524,95.226 C15.2@66.221,95.923
  Top Layer w1: U6.3 45.866,84.008 v1(48.89,84.008) C14.2 ; v1(50.419,75.123) 50.469,75.073 50.569,75.073 50.585,75.057 C10.1@52.936,75.057 ; C10.1@53.236,75.057 54.405,75.057 54.991,74.471 U2.8
  other v1: 66.421,95.923
+5-HV: C2.1 C9.1 C12.2 C16.2 C17.2 JP2.2 U2.1 U5.3 U7.1 | length 14
  Top Layer w0.2: U7.1@57.846,55.169 U7.1
  Top Layer w1: v1(46.797,56.261) 46.802,56.256 46.802,53.486 U5.3 ; v1(49.276,62.787) 54.925,62.787 U2.1 ; U7.1@57.846,55.169 57.85,55.165 C17.2 C17.2 v1(57.851,49.657)
+12: C13.2 C22.2 JP3.1 R5.2 R10.1 U6.1 U8.8 U8.9 X2.2 X6.2 | length 127.6
  Top Layer w1: R10.1 29.022,128.329 30.48,129.787 43.385,129.787 45.029,128.143 45.029,128.072 49.784,123.317 U8.8 46.228,119.734 C22.2 ; C13.2 C13.2@38.431,84.079 ; R5.2 38.481,84.029 C13.2@38.431,84.079 ; U8.9 51.462,114.808 C22.2 ; C13.2@38.431,84.079 38.454,84.079 38.531,84.002 U6.1 41.261,84.702 43.554,86.995 46.863,86.995 49.149,89.281 JP3.1 46.228,97.79 C22.2
  Bottom Layer w1: X2.2 32.266,109.982 41.402,109.982 C22.2
GND-HV: C2.2 C7.1 C8.1 C9.2 C11.1 C12.1 C16.1 C17.1 C18.1 C20.1 C23.1 D1.2 JP1.2 JP2.3 R2.1 U2.4 U4.2 U5.2 U7.3 U8.4 X3.1 X3.2 X7.1 X7.2 X8.2 | length 3.7
  Top Layer w3: U8.4 26.851,16.59 X3.1
GND-LV: C1.1 C3.2 C4.1 C5.2 C6.1 C10.2 C13.1 C14.1 C15.1 C19.1 C22.1 C23.2 C24.2 C26.1 D3.2 JP3.3 R4.2 R9.2 U1.3 U1.4 U2.5 U3.8 U6.2 U8.5 U8.6 U8.10 U9.1 X2.1 X6.1 X6.3 X6.4 X9.1 X9.5 | length 222.6
  Top Layer w0.5: U8.10@66.703,23.881 U8.10@67.564,23.02
  Top Layer w1: 13.843,29.972 C23.2 ; 54.991,1.524 C19.1
  Top Layer w3: U8.10@16.764,114.46 16.764,113.919 14.986,112.141 14.986,71.059 16.764,69.281 16.764,68.74 13.843,65.819 13.843,29.972 13.843,25.941 16.764,23.02 13.716,19.972 13.716,8.719 17.164,5.271 17.164,5 17.435,5 20.911,1.524 54.991,1.524 63.688,1.524 67.164,5 67.164,5.271 70.612,8.719 70.612,19.972 U8.10@67.564,23.02 ; C1.1@66.421,91.598 67.564,90.455 U8.10@67.564,68.74
NetC1_2: C1.2 U1.1 | length 2.4
  Top Layer w0.2: U1.1 65.193,94.726 66.221,93.698 C1.2
NetC4_2: C4.2 C5.1 U1.6 U1.7 U3.7 | length 15.9
  Top Layer w0.2: C5.1 57.654,93.895 U3.7 57.679,95.729 57.679,96.513 ; U1.7 61.29,95.251 60.804,95.251 59.178,96.877 58.043,96.877 57.679,96.513 ; C4.2 62.169,96.226 61.694,95.751 61.34,95.751 U1.6 61.29,95.751 60.87,95.751 59.24,97.381 57.531,97.381 57.277,97.127 57.277,96.915 57.679,96.513
NetC7_2: C7.2 F2.2 U4.1 | length 30.4
  Top Layer w1: F2.2@50.8,34.261 50.8,30.861 43.705,30.861 42.435,32.131 C7.2 42.354,35.369 43.815,36.83 53.467,36.83 54.332,37.695 U4.1
NetC8_2: C8.2 C11.2 JP2.1 U4.3 U5.1 | length 17.4
  Top Layer w1: JP2.1 48.641,50.038 47.808,49.205 47.808,49.181 47.508,48.881 U5.1 46.802,48.876 46.802,46.106 C11.2 46.797,41.519 48.822,39.494 C8.2 49.066,39.538 51.289,39.538 U4.3
NetC18_2: C18.2 U2.3 U7.2 | length 7.3
  Top Layer w1: U2.3 57.531,60.114 58.179,59.466 58.198,59.466 58.955,58.709 C18.2 59.005,58.659 58.955,58.659 58.955,57.758 58.269,57.072 U7.2
NetC19_2: C19.2 C20.2 F1.2 U8.1 | length 35.1
  Top Layer w3: C20.2 40.025,24.785 42.545,27.305 51.27,27.305 54.737,23.838 54.737,20.438 54.737,14.914 C19.2 55.046,14.605 57.959,14.605 U8.1
NetC24_1: C24.1 C25.2 R6.2 R7.2 U3.6 | length 22.3
  Top Layer w0.2: C24.1 55.153,87.815 54.933,87.815 53.34,89.408 53.34,95.73 54.13,96.52 56.896,96.52 57.154,96.262 U3.6
  Top Layer w0.5: R6.2 55.499,81.137 55.819,81.457 R7.2 C25.2 55.819,87.149 C24.1
NetC25_1: C25.1 C26.2 R7.1 R8.2 U3.5 | length 21.6
  Top Layer w0.2: U3.5 54.965,95.704 54.102,94.841 54.102,89.559 55.17,88.491 57.785,88.491 58.039,88.237 C26.2
  Top Layer w0.5: R8.2 58.039,81.137 57.719,81.457 R7.1 C25.1 57.719,86.895 C26.2
NetD1_1: D1.1 R3.1 X8.1 | length 37.8
  Top Layer w1: X8.1 35.715,62.329 43.942,54.102 43.942,48.387 41.676,46.121 38.755,46.121 37.477,44.843 D1.1 36.769,43.561 R3.1
NetD3_1: D3.1 R5.1 | length 2.6
  Top Layer w0.2: D3.1@40.967,76.666 D3.1
  Top Layer w1: R5.1 D3.1@40.967,76.666
NetF1_1: F1.1 F2.1 F3.1 F4.2 X1.1 X1.2 | length 83.2
  Top Layer w3: F4.2@30.89,46.482 34.29,46.482 31.369,43.561 31.369,24.772 X1.1 X1.2 44.817,16.63 44.817,20.438 F1.1@44.817,23.838 ; F2.1@60.72,30.861 60.72,34.261 63.543,37.084 66.04,37.084 F3.1@69.44,37.084
  Bottom Layer w3: F1.1@44.817,23.838 49.111,23.838 56.134,30.861 F2.1@60.72,30.861
NetF3_2: F3.2 R1.1 | length 5.9
  Top Layer w2: R1.1 63.577,47.004 66.04,47.004 F3.2@69.44,47.004
NetF4_1: F4.1 X5.1 X5.2 | length 12.3
  Top Layer w3: X5.2 27.813,53.325 30.89,56.402 F4.1@34.29,56.402
NetJP1_1: JP1.1 R3.2 U8.2 | length 35
  Top Layer w1: R3.2 34.956,39.847 39.593,39.847 JP1.1
  Bottom Layer w1: JP1.1 39.624,26.416 41.529,24.511 41.529,20.066 43.434,18.161 47.672,18.161 49.243,16.59 U8.2
NetR1_2: R1.2 R2.2 TP1.1 U2.2 | length 29.1
  Top Layer w1: TP1.1 45.466,59.309 46.736,58.039 53.213,58.039 ; R1.2 54.417,46.99 53.213,48.194 53.213,58.039 ; U2.2 56.261,61.976 53.213,58.928 53.213,58.039
NetR4_1: R4.1 X4.1 X4.2 X6.8 X9.6 | length 93.9
  Top Layer w1: 27.722,81.323 25.527,83.518 25.527,115.189 20.734,119.982 20.734,124.848 24.029,128.143 26.823,130.937 53.713,130.937 X4.2 ; R4.1 56.486,127.032 56.486,128.05 X4.2 ; X4.1 X4.2
NetR6_1: R6.1 TP2.1 U2.7 | length 11.8
  Top Layer w0.5: TP2.1 52.313,80.518 55.199,77.632 R6.1 55.499,76.327 56.261,75.565 U2.7
NetR8_1: R8.1 U2.6 | length 3.9
  Top Layer w0.5: U2.6 57.531,75.565 58.039,76.073 R8.1
NetR9_1: R9.1 X6.5 X9.8 | length 60.8
  Top Layer w1: 27.722,74.323 32.893,79.494 32.893,117.331 33.479,117.917 R9.1 35.748,117.917 37.99,120.159 37.99,124.682 34.529,128.143
NetR10_2: R10.2 X6.6 X9.7 | length 51.7
  Top Layer w1: 27.722,77.823 30.988,81.089 R10.2@30.988,120.076 ; R10.2 30.955,120.175 30.955,127.857 30.972,127.873 30.972,128.086 31.029,128.143
NetU3_2: U3.2 X9.4 | length 54
  Top Layer w0.2: v1(54.371,99.413) 56.261,99.413 56.515,99.667 57.309,99.667 57.651,99.325 57.651,98.807 U3.2
  Bottom Layer w1: 27.722,88.323 26.035,90.01 26.035,100.457 33.19,107.612 50.249,107.612 54.356,103.505 54.356,99.428 v1(54.371,99.413)
NetU3_3: U3.3 X9.3 | length 39.1
  Top Layer w0.2: v1(51.943,97) 51.971,97.028 55.864,97.028 57.129,98.293 57.129,98.779 U3.3
  Bottom Layer w1: 27.722,91.823 27.803,91.823 27.953,91.973 27.965,91.973 38.1,102.108 50.722,102.108 51.308,101.522 51.308,97.708 51.943,97.073 v1(51.943,97)
NetU3_4: U3.4 X9.2 | length 37.9
  Top Layer w0.2: v1(53.086,98.27) 56.512,98.27 56.629,98.387 56.629,98.779 U3.4
  Bottom Layer w1: 27.722,95.323 36.666,104.267 51.054,104.267 52.705,102.616 52.705,98.724 53.086,98.343 v1(53.086,98.27)
pads on no net: U1.5 U1.8 U8.3 U8.7 X1. X2. X3. X4. X5. X6. X6.7 X7. X8. X9.

## Polygon pours and split planes (outlines as drawn)
GND-LV on Top Layer "Top Layer-GND-LV" (solid, remove dead copper, pour order 16): 12.164,73.914 12.164,140 72.164,140 72.164,73.914
GND-HV on Top Layer "GND-HV_L01_P015" (solid, remove dead copper, pour order 15): 26.924,63.913 26.924,14.224 48.447,14.224 48.646,37.338 60.833,37.338 60.833,63.913
GND-LV on Bottom Layer "Top Layer-No Net" (solid, remove dead copper, pour order 19): 12.164,73.914 12.164,140 72.164,140 72.164,73.914
+5-HV on Bottom Layer "+5-HV_L02_P018" (solid, remove dead copper, pour order 18): 45.593,63.881 59.182,63.881 59.182,46.101 45.593,46.101
+3.3-LV on Bottom Layer "+3.3-LV_L02_P017" (solid, remove dead copper, pour order 17): 48.006,101.727 67.437,101.727 67.437,74.295 48.006,74.295

## Silkscreen, mask and mechanical layers (free items; w line width, h text height)
Top Overlay:
  lines w1: 12.7,35.179 12.7,65.278 71.501,65.278 71.501,32.766 63.246,32.766 63.246,12.446 47.752,12.446 47.752,0.508 21.336,0.508 21.336,16.764 25.273,20.701 25.273,35.179 12.7,35.179
  text "GLV" at 18.35,120.461 h3 r90
  text "HV" at 69.15,55.183 h3 r90
Board Outline:
  the board outline again, w0.254
CutOuts:
  lines w2: 22.479,35.941 22.479,21.336 19.177,18.034 19.177,13.589 23.241,9.525 ; 51.181,10.16 63.5,10.16 65.024,11.684 65.024,18.161 62.484,20.701 62.484,25.654 65.532,28.702 ; 52.832,68.834 59.69,68.834 66.167,62.357